# EAGLE board placa_crossover_system_pro (EAGLE 6.5.0)
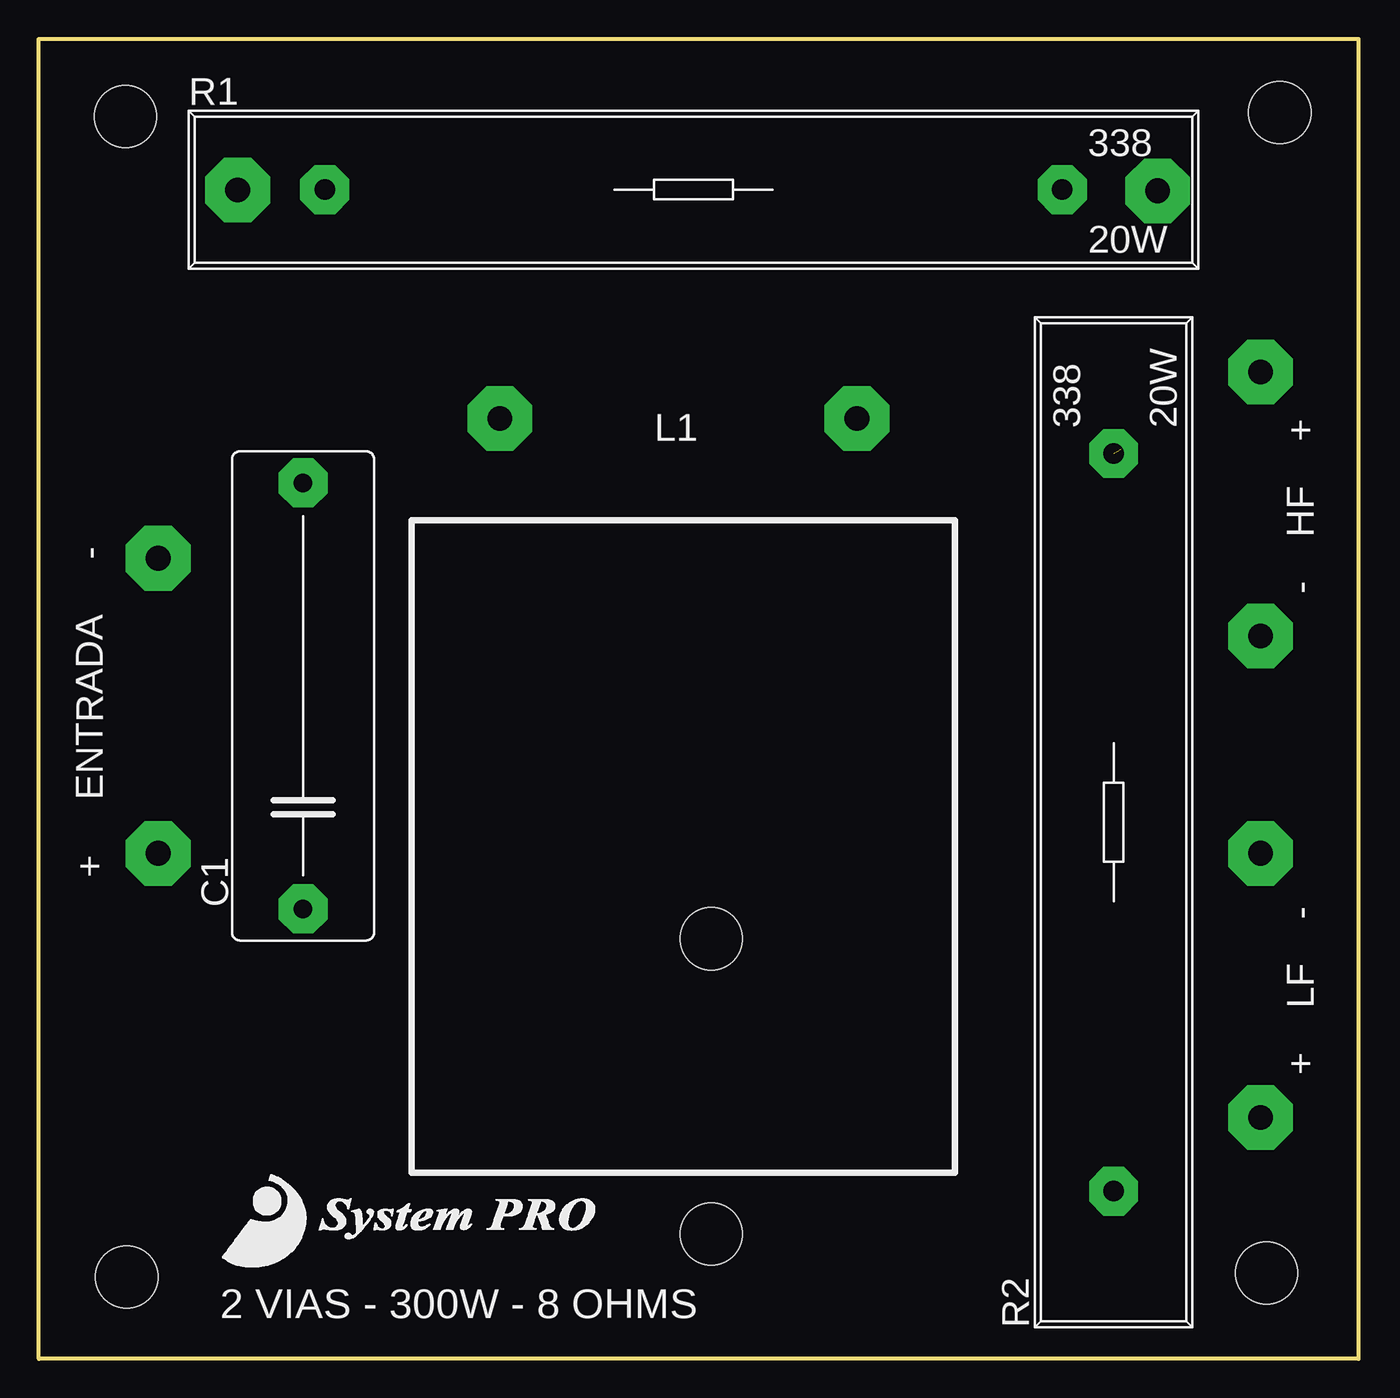
[diagram p0: board, top side]
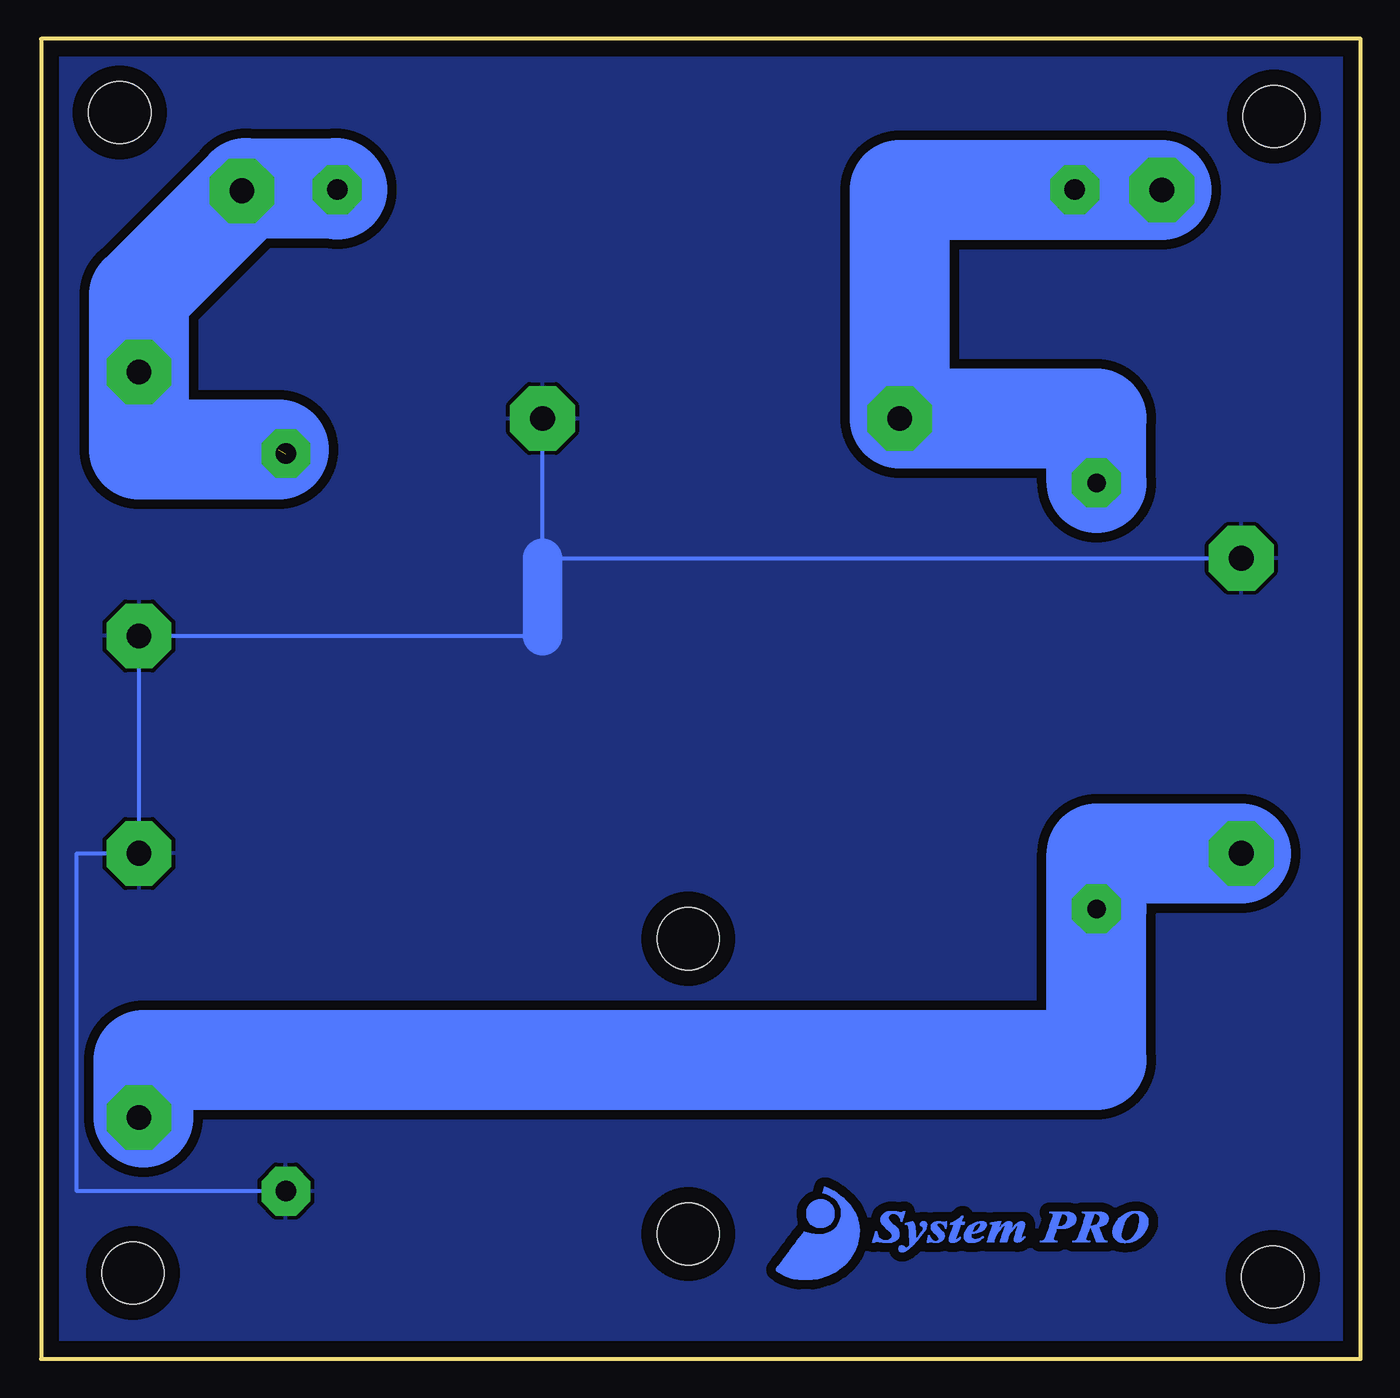
[diagram p1: board, bottom side, seen from below]

Size 85 x 85 mm. Coordinates in mm from the lower left corner, seen from the top.
Outline: 0,85 85,85 85,0 0,0 0,85
Copper layers (1*16): Top 0.035mm / dielectric 1.5mm / Bottom 0.035mm
Design rules "default": minimum track width 10mil, minimum drill 24mil, track to track 8mil, track to pad 8mil, pad to pad 8mil, via to via 8mil, smd to smd 8mil, copper to edge 40mil, drill to drill 8mil, minimum pad ring 10mil, minimum via ring 8mil, stop-mask expansion 4mil, vias tented up to drill 0mil, thermal gap 10mil
Holes 4 mm at 5.59,79.99 79.08,5.53 43.32,8.05 79.93,80.25 5.66,5.28 43.32,27.05

## Footprints (pad centres in the part's own frame; a part is rotated, then mirrored left to right if it is on the bottom)
C27.5B9 = drill 1.194 pad 3.15 octagon: 1 -13.716,0; 2 13.716,0
4,16O1,6 = drill 1.6 pad 4.166 octagon: 1 0,0
KWP338 = drill 1.321 pad 3.15 octagon: 1 -23.749,0; 2 23.749,0

## Placement (x,y rotation side)
C1  2,2uF  [C27.5B9]  17.02,42.69 90 top
E$1  [4,16O1,6]  72.06,75.21 270 top
E$2  [4,16O1,6]  7.69,51.55 0 top
E$3  [4,16O1,6]  12.81,75.27 0 top
E$4  [4,16O1,6]  7.69,32.55 0 top
E$5  [4,16O1,6]  29.69,60.55 0 top
E$6  [4,16O1,6]  52.69,60.55 0 top
E$7  [4,16O1,6]  78.69,63.55 0 top
E$8  [4,16O1,6]  78.69,46.55 0 top
E$9  [4,16O1,6]  78.69,32.55 0 top
E$10  [4,16O1,6]  78.69,15.55 0 top
R1  10  [KWP338]  42.17,75.29 0 top
R2  10  [KWP338]  69.23,34.55 90 top

## Library data of the parts
C1 = capacitor-wima
E$1-E$10 = wirepad
R1 R2 = resistor-power

## Nets
GND: E$2.1 E$6.1 E$8.1 E$9.1 R2.1
S$1: C1.2 E$3.1 E$5.1 R1.1
S$2: E$7.1 R1.2 R2.2
S$3: C1.1 E$4.1 E$10.1

## Tracks (layer width: path | path; a pad name or v marks a point on that pad's centre or on a via)
GND
  Bottom 0.254: E$2.1 52.69,51.55 E$6.1 | 52.69,46.55 E$8.1 E$9.1 82.69,32.55 82.69,10.8 R2.1
  Bottom 2.54: 52.69,46.55 52.69,51.55
  pour Bottom (isolate 0.61): -1.31,-0.45 -1.31,85.55 85.69,85.55 85.69,-0.45
S$1
  Bottom 2.54: R1.1 13.81,75.29 E$3.1
  Bottom 6.452: E$3.1 29.69,75.27 E$5.1 17.02,60.55 C1.2
S$2  (1 unrouted)
  Bottom 6.452: 69.69,58.55 78.69,58.55 E$7.1 78.69,68.5 71.8,75.39 66.02,75.39 R1.2
S$3
  Bottom 0.406: E$10.1 78.4,15.55
  Bottom 6.452: E$4.1 17.02,32.55 C1.1 17.02,19.26 78.4,19.26 78.4,15.55
(copper drawn outside any net)
  shapes: Bottom area x1191

## Text on the board
tPlace: L1 | + ENTRADA - | - HF + | + LF - | 2 VIAS - 300W - 8 OHMS